# Altium PCB Ethernet Module PCB.PcbDoc
Units mil, origin at the board's own origin, x right, y up, seen from the top; angles counter-clockwise.
Board outline 1174 x 1290 mil, 2 copper layers (Top Layer, Bottom Layer); 18 components, 23 nets, 77 pads, 9 vias.
Unrouted connection lines stored in the file: 1.
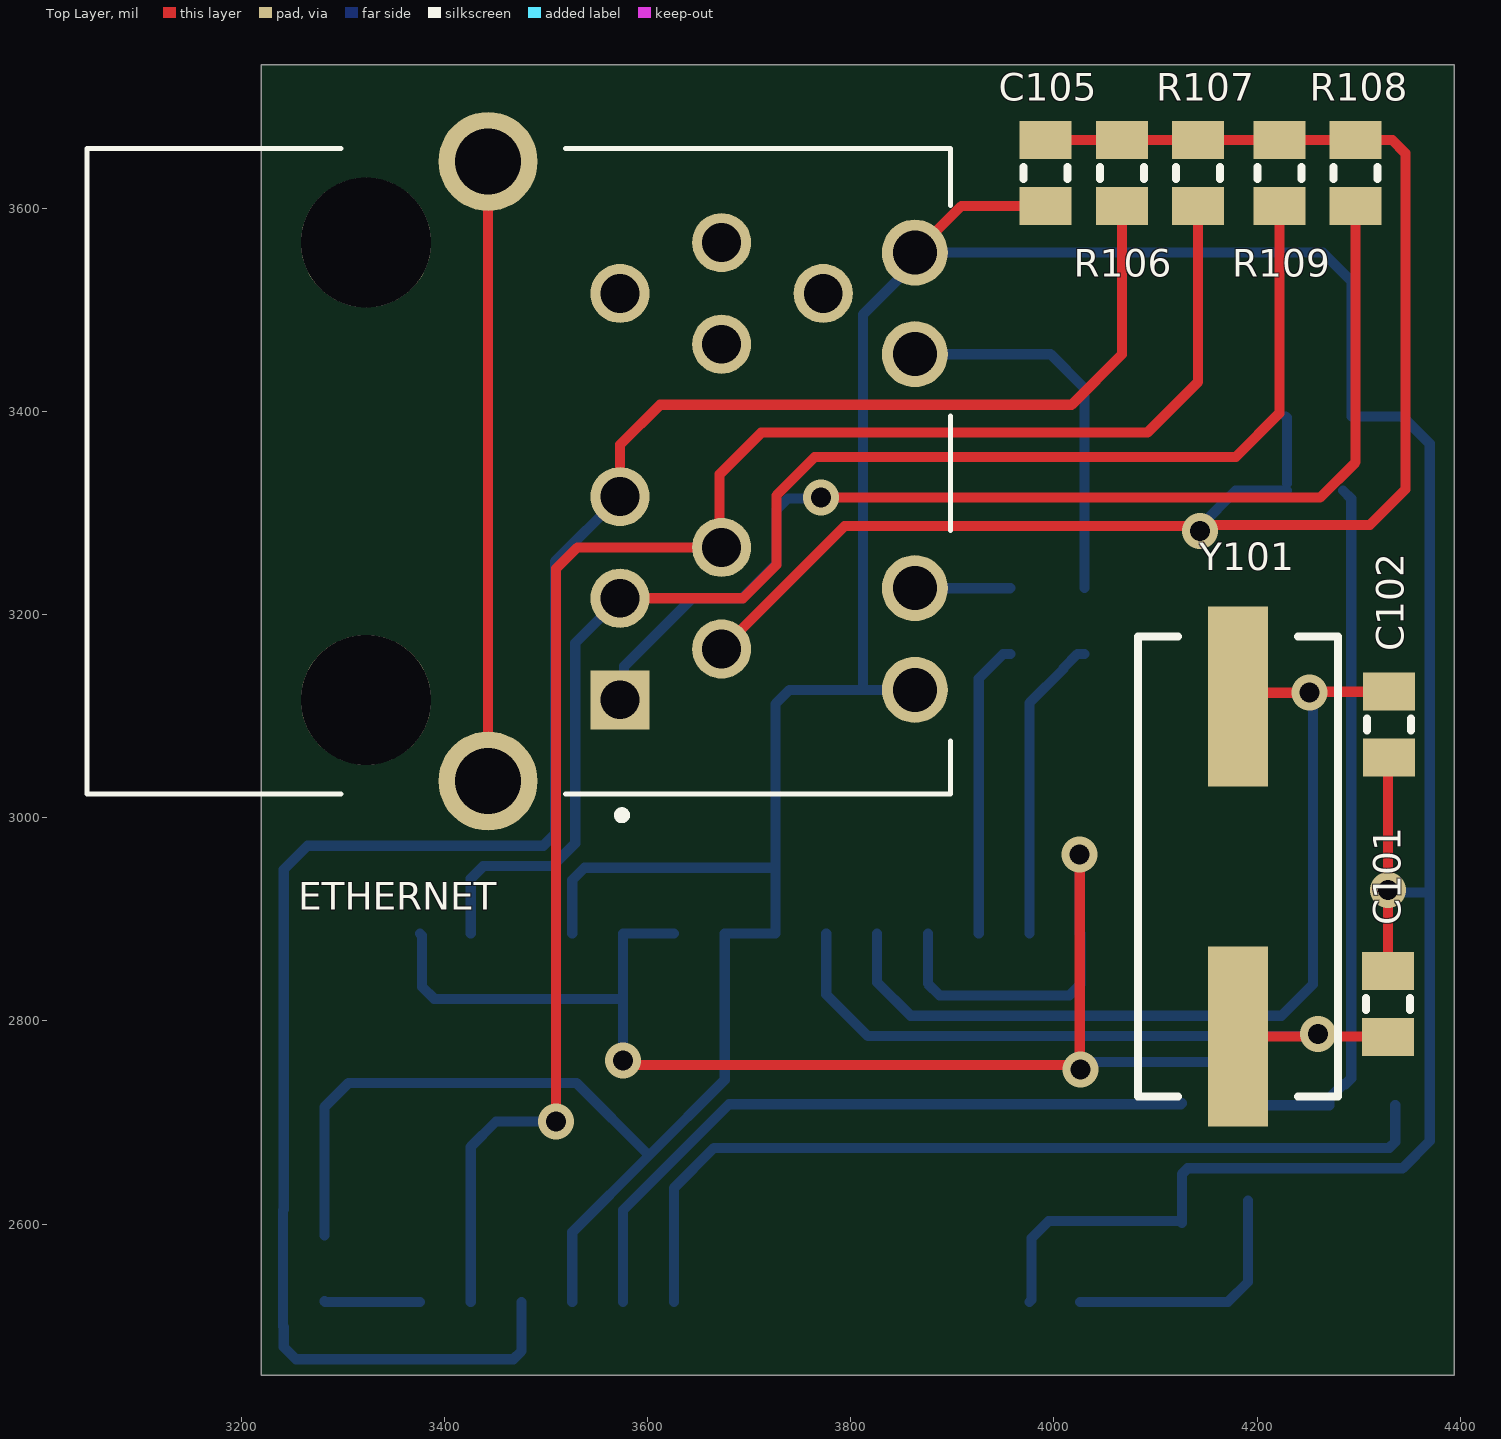
[diagram p0: Top Layer view]
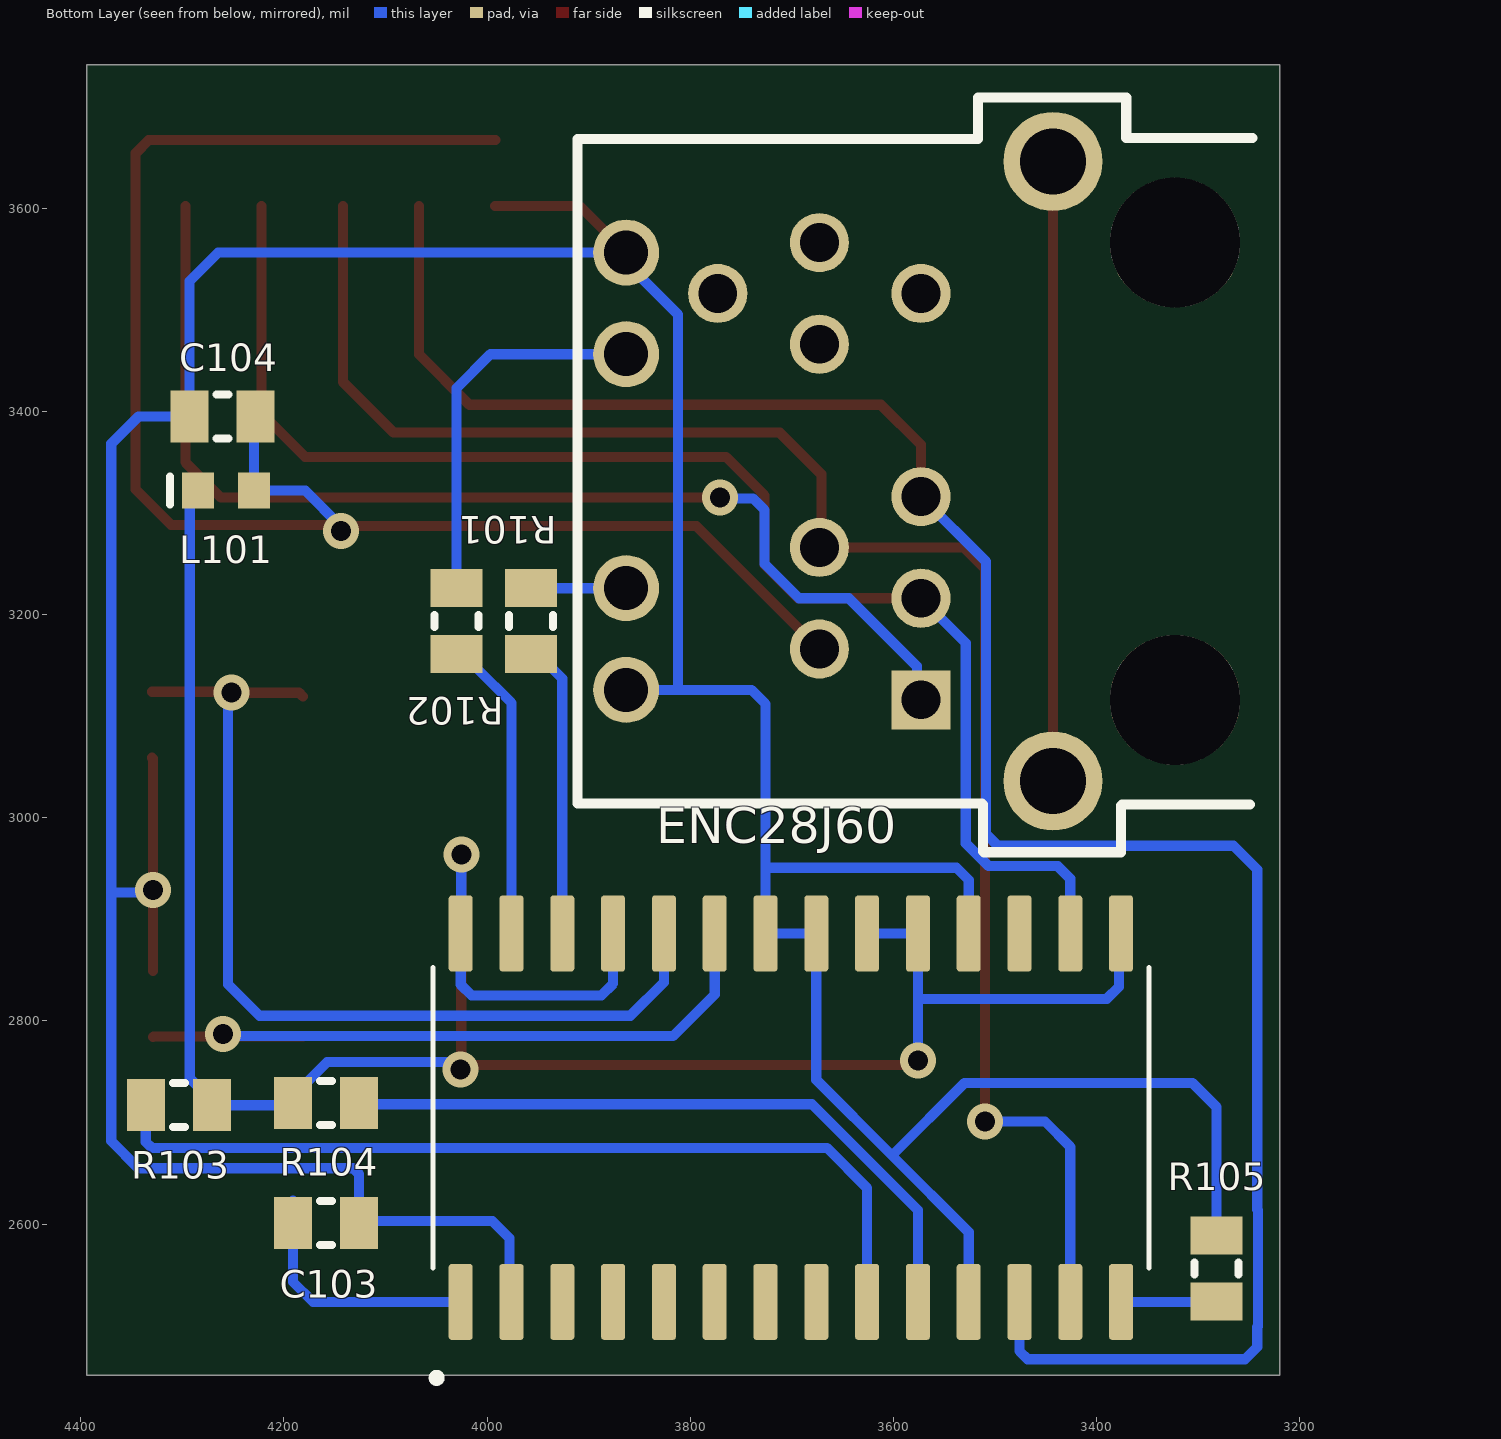
[diagram p1: Bottom Layer view, seen from below]
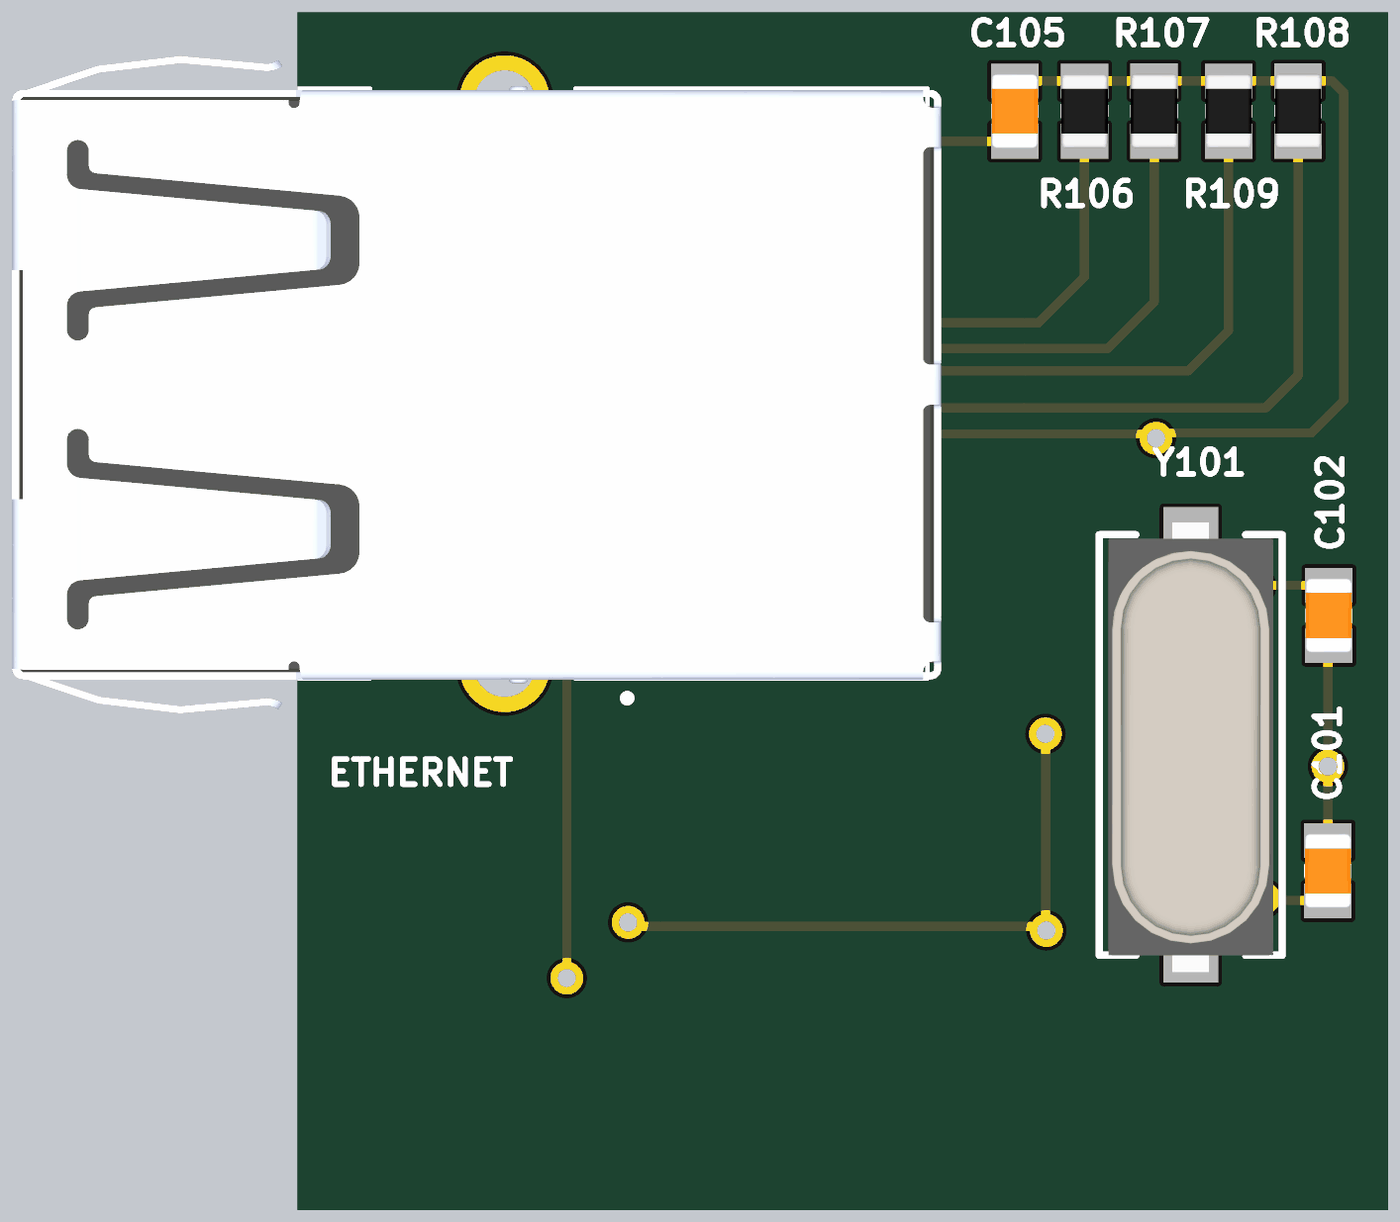
[diagram p2: 3D render of the assembled board from above, using the file's embedded part models]
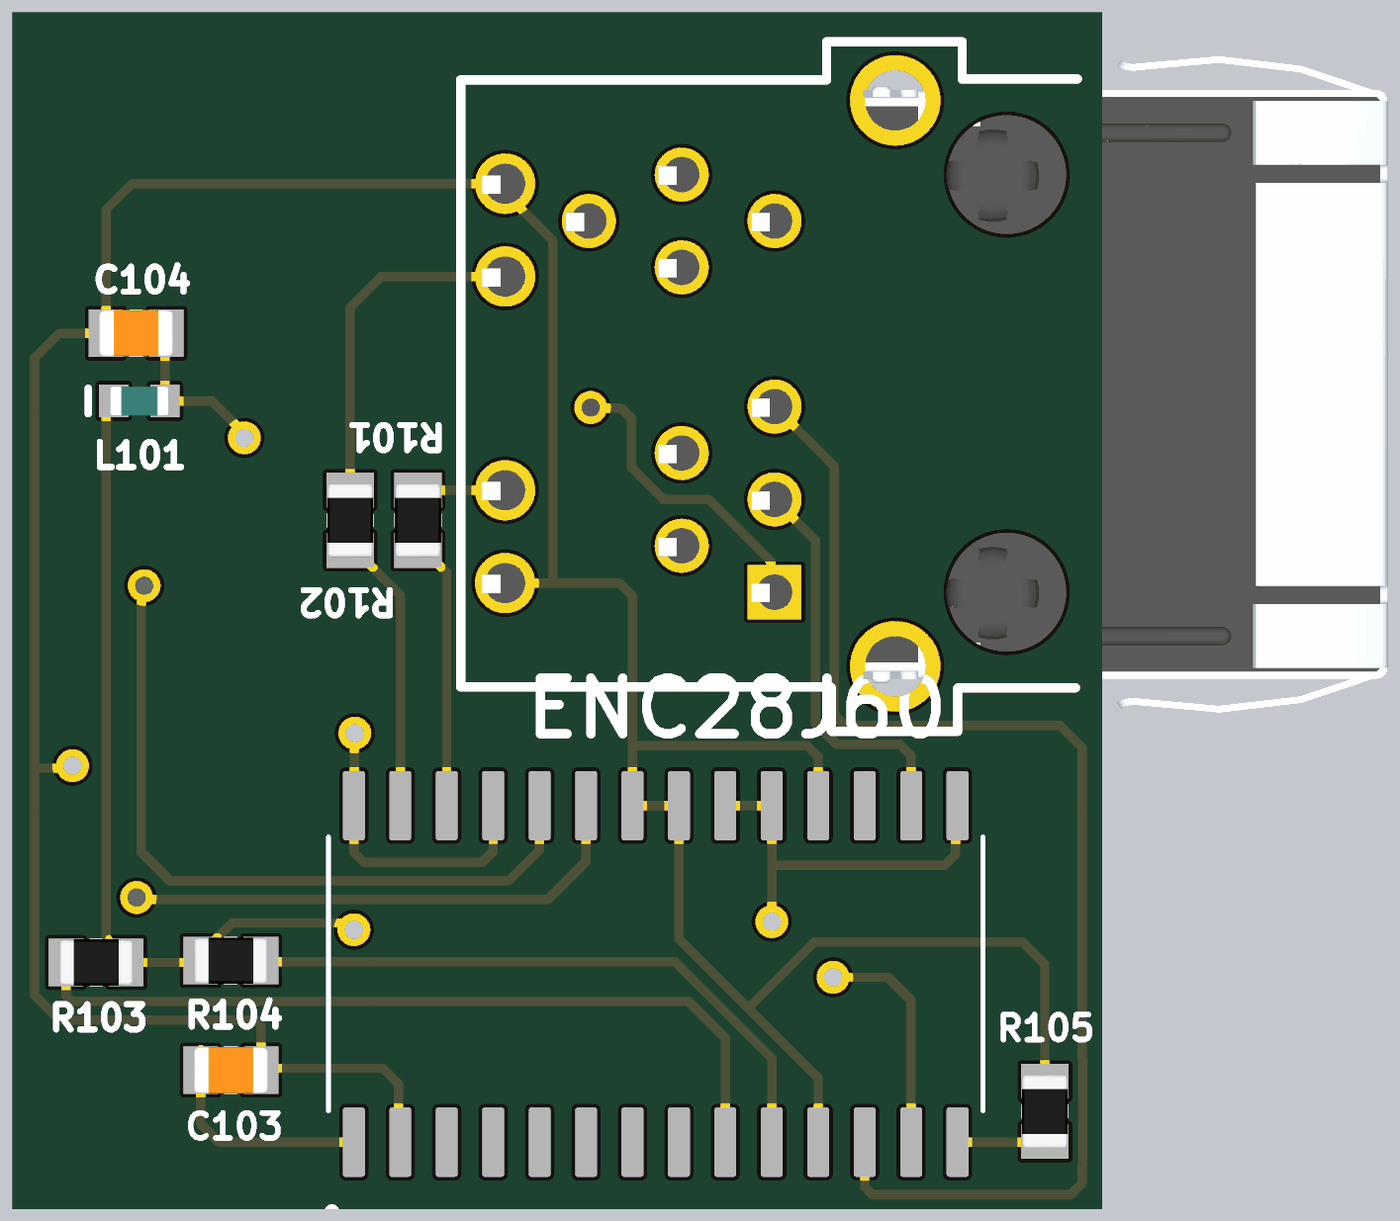
[diagram p3: 3D render of the assembled board from below, using the file's embedded part models]

## Layer stack, top to bottom
Top Solder: solder mask 0.4, Solder Resist, Dk 3.5
Top Layer: signal copper 1.4
Dielectric 1: dielectric 12.6, FR-4, Dk 4.8
Bottom Layer: signal copper 1.4
Bottom Solder: solder mask 0.4, Solder Resist, Dk 3.5

## Board outline
3220,2451 4394,2451 4394,3741 3220,3741

## Design rules (kind name [scope] priority, off if disabled: settings)
Clearance [All] p1: gap=10 ignorepadtopadclearanceinfootprint=FALSE
PolygonConnect [All] p1: connectstyle=Relief reliefconductorwidth=10 reliefentries=4 polygonreliefangle="90 Angle" airgapwidth=10
RoutingVias [All] p1: holewidth=19.68 width=35.43 viastyle="Through Hole" minholewidth=19.68 minwidth=35.43 maxholewidth=19.68 maxwidth=35.43
SolderMaskExpansion [All] p1: expansion=4 istentingtop=FALSE
Width [All] p1: maxlimit=10 minlimit=10 preferedwidth=10
30 further rules are at their usual default settings.

## Components (designator, comment, footprint, x,y, rotation, side; value= is the part's Value field where it differs from the comment)
C101 "18pF" SMD_CAP_0805 4329,2784.04 r90 top
C102 "18pF" SMD_CAP_0805 4330,3123.96 r270 top
C103 "10uF" SMD_CAP_0805 4126,2601 r0 bottom
C104 "0.01uF" SMD_CAP_0805 4293,3395 r180 bottom
C105 "0.01uF" SMD_CAP_0805 3992,3602 r90 top
ENC28J60 "ENC28J60" SOIC127P1030X265-28N 3701,2704.7 r90 bottom (schematic designator U)
ETHERNET "SI-52008-F" BEL_SI-52008-F 3323,3341 r270 top (schematic designator J)
L101 "Inductor" INDC1608L 4257,3322 r180 bottom value=10mH
R101 "1K" "RES 0805 (2012X06L)" 3957,3226 r270 bottom
R102 "1K" "RES 0805 (2012X06L)" 4030,3226 r270 bottom
R103 "10K" "RES 0805 (2012X06L)" 4271.04,2717 r0 bottom
R104 "10K" "RES 0805 (2012X06L)" 4191,2719 r180 bottom
R105 "10K" "RES 0805 (2012X06L)" 3282,2588.96 r270 bottom
R106 "50/1%" "RES 0805 (2012X06L)" 4067,3602 r90 top
R107 "50/1%" "RES 0805 (2012X06L)" 4142,3667 r270 top
R108 "50/1%" "RES 0805 (2012X06L)" 4297,3667 r270 top
R109 "50/1%" "RES 0805 (2012X06L)" 4222,3602 r90 top
Y101 "11.0592 MHz" "Crystal SMD" 4181.35,2952 r90 top

## Footprints (in the part's own frame and the unit in brackets; to place one, negate y for a bottom-side part, rotate by r counter-clockwise, add the part's x,y. Pads: shape width x height; smd on the part's side, far side on the other; paste and mask are expansions set on the pad)
BEL_SI-52008-F [mm]
  rect 1.478x1.478 hole 0.97: 1(5.715,6.35)
  round 1.478 hole 0.97: 2(4.445,8.89) 3(3.175,6.35) 4(1.905,8.89) 5(0.635,6.35) 8(-3.175,8.89) 9(-4.445,6.35) 10(-5.715,8.89) 11(-4.445,11.43)
  round 1.65 hole 1.1: G_A(-2.925,13.72) G_K(-5.465,13.72) Y_A(5.465,13.72) Y_K(2.925,13.72)
  round 2.475 hole 1.65: S1(-7.745,3.05) S2(7.745,3.05)
  round 3.25 hole 3.25 unplated: ""(-5.715,0) ""(5.715,0)
  silkscreen extent -8.07,-6.98 8.7,14.61, body extent -8.96,-10.41 9.02,14.99, height 14.78
"Crystal SMD" [mm] "DESIGNER ABBAS BASEREH"
  rect 4.5x1.5 smd: 1(-4.25,0) 2(4.25,0)
  silkscreen extent -5.75,-2.5 5.75,2.5, body extent -6.21,-2.25 6.09,2.25, height 5.18
INDC1608L [mm] "Chip Inductor, Body 1.6x0.8mm, IPC High Density"
  rect 0.8x0.9 smd: 1(-0.7,0) 2(0.7,0)
  silkscreen extent -1.4,-0.35 -1.4,0.35, body extent -0.8,-0.4 0.8,0.4, height 0.95
"RES 0805 (2012X06L)" [mm] "Chip Resistor, 2-Leads, Body 2.0x1.3mm, IPC High Density _ (0.100 W)"
  rect 0.95x1.3 smd: 1(0,0) 2(1.65,0)
  silkscreen extent 0.67,-0.55 0.97,0.55, body extent -0.19,-0.63 1.84,0.64, height 0.6
SMD_CAP_0805 [mm]
  rect 0.95x1.3 smd: 1(0,0) 2(1.65,0)
  silkscreen extent 0.67,-0.55 0.97,0.55, body extent -0.19,-0.63 1.84,0.64, height 0.65
SOIC127P1030X265-28N [mm]
  rrect25% 1.9x0.6 smd: 1(-4.605,8.255) 2(-4.605,6.985) 3(-4.605,5.715) 4(-4.605,4.445) 5(-4.605,3.175) 6(-4.605,1.905) 7(-4.605,0.635) 8(-4.605,-0.635) 9(-4.605,-1.905) 10(-4.605,-3.175) 11(-4.605,-4.445) 12(-4.605,-5.715) 13(-4.605,-6.985) 14(-4.605,-8.255) 15(4.605,-8.255) 16(4.605,-6.985) 17(4.605,-5.715) 18(4.605,-4.445) 19(4.605,-3.175) 20(4.605,-1.905) 21(4.605,-0.635) 22(4.605,0.635) 23(4.605,1.905) 24(4.605,3.175) 25(4.605,4.445) 26(4.605,5.715) 27(4.605,6.985) 28(4.605,8.255)
  silkscreen extent -6.6,-8.95 3.75,8.95

## Part data
C101 C102 C103 C104 C105: library part Cap-Bipolar, "Bipolar Capacitor", Voltage=100V, Adding Date=1387/12/20, Designer="Saeid Jorablo", Organazation=ControTec
ENC28J60: "Ethernet Controller 10 Base-T PHY SPI Interface 28-SSOP", Package="SSOP Microchip", Availability=Unavailable, MF=Microchip, MP=ENC28J60, Price=None, SnapEDA_Link=https://www.snapeda.com/parts/ENC28J60/Microchip/view-part/105825/?ref=snap
ETHERNET: "1 Port RJ45 Magjack Connector Through Hole 10/100 Base-T, AutoMDIX, Power over Ethernet _PoE_", Package=None, Availability=Unavailable, MF="Stewart Connector", MP=SI-52008-F, Price=None, SnapEDA_Link=https://www.snapeda.com/parts/SI-52008-F/Stewart%20Connector/view-part/214280/?ref=snap
R101 R102 R103 R104 R105 R106 R107 R108 R109: library part Resistor, "Resistor", Power="1/8 W", Tolerance=5%
Y101: library part XTAL, "XTAL Crystal", Company=E.P.I.L, Design Date=11/04/2011
L101: Code_IEC=1005, Code_JEITA=0402, LatestRevisionDate=29-May-2009, LatestRevisionNote="IPC-7351 Footprint Added.", PackageDescription="Chip Inductor", PackageReference=0402-A, Published=8-Jun-2000, Publisher="Altium Limited"

## Via types
v1: diameter 35.43, hole 19.68, Top Layer to Bottom Layer, 9 vias

## Nets (pads, with @x,y where several pads share a name; then routed paths per layer and width w, separated by ;. In a path a pad name is that pad's centre, name@x,y a point inside that pad or via, vN(x,y) a via of type N, cw(c..) or ccw(c..) an arc to the next point about the centre after c; other vN are vias at no path point)
3.3: ENC28J60.15 ENC28J60.19 ENC28J60.20 ENC28J60.25 ENC28J60.28 L101.1 R103.1 R104.1 | length 2321.1
  Top Layer w10: v1(3576,2761) 3580.36,2756.64 4021.64,2756.64 4025.5,2752.78 4025.5,2963.5 v1(4025,2964)
  Bottom Layer w10: ENC28J60.15 3378.1,2883.9 3378.1,2833.6 3390,2821.7 3576,2821.7 ; v1(3576,2761) 3576,2821.7 ; ENC28J60.20 ENC28J60.19 3576,2821.7 ; ENC28J60.25 3876,2836.7 3887.7,2825 4015.3,2825 4026,2835.7 ENC28J60.28 4025.5,2886.5 4025.5,2963.5 v1(4025,2964) ; v1(4026,2752.28) 4032.88,2752.28 4040.19,2759.59 4157.3,2759.59 4191,2725.89 R104.1 4193,2717 R103.1 4271.04,2723.89 4284.74,2737.59 4286.86,2737.59 4292.72,2743.45 4292.72,3313.84 L101.1
CLK: ENC28J60.8
CLKOUT: ENC28J60.3
CS: ENC28J60.9 R103.2 | length 877
  Bottom Layer w10: ENC28J60.9 3626,2635.43 3665.57,2675 4330.14,2675 4336,2680.86 R103.2
GND: C101.2 C102.2 C103.1 C104.1 C105.1 ENC28J60.2 ENC28J60.11 ENC28J60.18 ENC28J60.21 ENC28J60.22 ETHERNET.G_K ETHERNET.Y_A R105.1 | length 4313.4
  Top Layer w10: ETHERNET.G_K 3909,3602 C105.1 ; C101.2 v1(4329,2929) 4329,3058 C102.2
  Bottom Layer w10: R105.1 3282,2715 3306,2739 3530,2739 3601.5,2667.5 ; ENC28J60.11 3526,2592 3601.5,2667.5 ; ENC28J60.18 3526,2938.7 3538,2950.7 3723.14,2950.7 3726,2947.84 ; 3812,3125.84 3812,3495 3863.16,3546.16 ETHERNET.G_K 4264.84,3556.16 4293,3528 C104.1 4343,3395 4370,3368 4370,2926.28 ; ETHERNET.Y_A 3809,3125.84 3739.84,3125.84 3726,3112 3726,2947.84 ; ENC28J60.2 3978,2525.4 3978,2586 3995,2603 4124,2603 C103.1 4126,2649.14 4131.86,2655 4343.28,2655 4370,2681.72 4370,2926.28 ; v1(4329,2929) 4331.72,2926.28 4370,2926.28 ; 3601.5,2667.5 3676,2742 ENC28J60.21 ENC28J60.22 3726,2947.84
INT: ENC28J60.4
LED_A: ETHERNET.G_A R102.1 | length 377.6
  Bottom Layer w10: ETHERNET.G_A 3996.84,3456.16 4030,3423 R102.1
LED_B: ETHERNET.Y_K R101.1 | length 93.9
  Bottom Layer w10: ETHERNET.Y_K 3956.84,3225.84 R101.1
NetC103_2: C103.2 ENC28J60.1 | length 253.1
  Bottom Layer w10: ENC28J60.1 4171.4,2523.4 4191,2543 C103.2@4191,2623
NetC104_2: C104.2 C105.2 ETHERNET.2 L101.2 R106.2 R107.1 R108.1 R109.2 | length 1601.7
  Top Layer w10: ETHERNET.2 3794,3287 4139.28,3287 v1(4144,3282.28) ; C105.2 R106.2 R107.1 R107.1 R109.2 R109.2 R109.2 R108.1 4333,3667 4346,3654 4346,3323 4311,3288 4145,3288 v1@4144,3287
  Bottom Layer w10: v1(4144,3282.28) 4144,3287 4179,3322 L101.2 ; C104.2 4229.44,3393.6 L101.2@4229.44,3329
NetJ_S1: ETHERNET.S1 ETHERNET.S2 | length 609.8
  Top Layer w10: ETHERNET.S2 ETHERNET.S1
NetR101_2: ENC28J60.26 R101.2 | length 291.9
  Bottom Layer w10: ENC28J60.26 3926,3136.93 3936.41,3147.34 3950.11,3161.04 R101.2
NetR102_2: ENC28J60.27 R102.2 | length 301.4
  Bottom Layer w10: ENC28J60.27 3976,3113 4009.41,3146.41 4009.41,3147.34 4023.11,3161.04 R102.2
NetR105_2: ENC28J60.14 R105.2 | length 94.2
  Bottom Layer w10: R105.2 3282.6,2523.4 ENC28J60.14
OSC1: C101.1 ENC28J60.23 Y101.1 | length 709.7
  Top Layer w10: Y101.1 4254.86,2784.68 4328.36,2784.68 C101.1
  Bottom Layer w10: ENC28J60.23 3776,2826 3817,2785 4258,2785 v1(4260,2787)
OSC2: C102.1 ENC28J60.24 Y101.2 | length 942
  Top Layer w10: Y101.2 4185.03,3123 v1(4251.84,3123) ; v1@4251.84,3123.96 4258,3123.96 C102.1
  Bottom Layer w10: ENC28J60.24 3826,2838 3859,2805 4224,2805 4255,2836 4255,3119.84 v1(4251.84,3123)
RESET: ENC28J60.10 R104.2 | length 684
  Bottom Layer w10: ENC28J60.10 3576,2613.72 3680.28,2718 4125.04,2718 R104.2
SI: ENC28J60.7
SO: ENC28J60.6
TPIN+: ENC28J60.13 ETHERNET.4 R107.2 | length 1717.2
  Top Layer w10: v1(3510,2701) 3510,3245 3531,3266 ETHERNET.4 3671,3268 3671,3338 3712,3379 4092,3379 4142,3429 R107.2
  Bottom Layer w10: ENC28J60.13 3426,2676 3451,2701 v1(3510,2701)
TPIN-: ENC28J60.12 ETHERNET.5 R106.1 | length 2129
  Top Layer w10: ETHERNET.5 3573,3367 3612.5,3406.5 4017.5,3406.5 4067,3456 R106.1
  Bottom Layer w10: ENC28J60.12 3476,2475 3468,2467 3254,2467 3242,2479 3242,2498.5 3241.41,2499.09 3241.41,2613.87 3242,2614.47 3242,2949 3265.36,2972.36 3497.36,2972.36 3508.91,2983.91 3508.91,3251.91 ETHERNET.5
TPOUT+: ENC28J60.17 ETHERNET.1 R108.2 | length 1121
  Top Layer w10: v1(3771,3315) 4262,3315 4297,3350 R108.2
  Bottom Layer w10: ETHERNET.1 3577,3120 3577,3149 3644,3216 3693,3216 3727,3250 3727,3303 3738.28,3314.28 3770.28,3314.28 v1(3771,3315)
TPOUT-: ENC28J60.16 ETHERNET.3 R109.1 | length 1399.1
  Top Layer w10: ETHERNET.3 3694,3216 3727,3249 3727,3317.27 3764.73,3355 4179,3355 4222,3398 R109.1
  Bottom Layer w10: ENC28J60.16 3426,2940 3438.36,2952.36 3506.36,2952.36 3528.91,2974.91 3528.91,3171.91 ETHERNET.3
pads on no net: ENC28J60.5 ETHERNET. ETHERNET.8 ETHERNET.9 ETHERNET.10 ETHERNET.11

## Silkscreen, mask and mechanical layers (free items; w line width, h text height)
Bottom Overlay:
  lines w10: 3247,3669 3371,3669 3371,3709 3517,3709 3517,3668 3911,3668 3911,3228 3911,3014 3757,3014 3513,3014 3512,3013 3512,2967 3511,2966 3376,2966 3376,2975 3376,3012 3375,3013 3249,3013

## Text inside footprints (layer, text, board x,y; h text height)
ETHERNET: Mechanical 13 "PCB EDGE" at 3055.68,3006.94 h32 r270